# Altium PCB PCB1.PcbDoc
Units mil, origin at the board's own origin, x right, y up, seen from the top; angles counter-clockwise.
Board outline 6000 x 4000 mil, 2 copper layers (Top Layer, Bottom Layer); 70 components, 59 nets, 144 pads, 0 vias.
Unrouted connection lines stored in the file: 86.
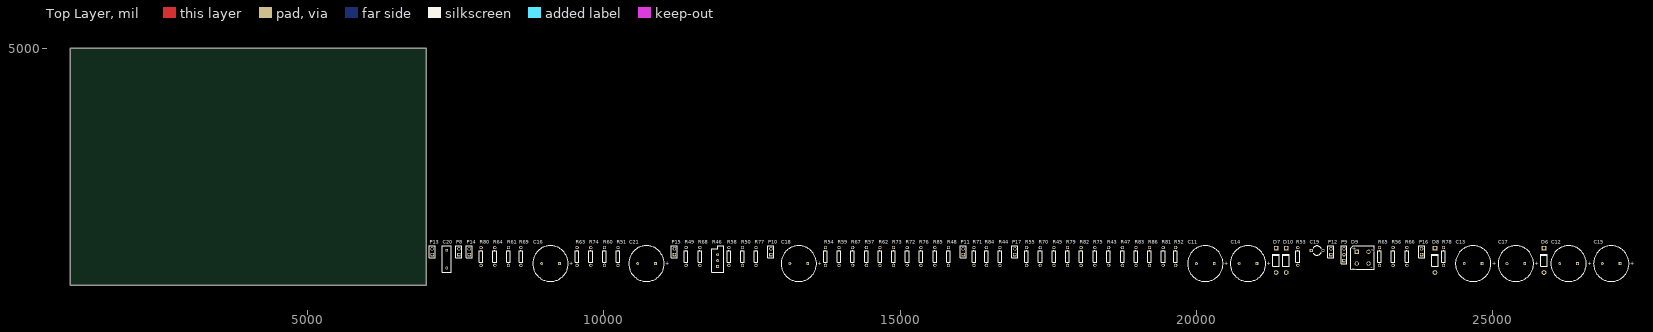
[diagram p0: Top Layer view]
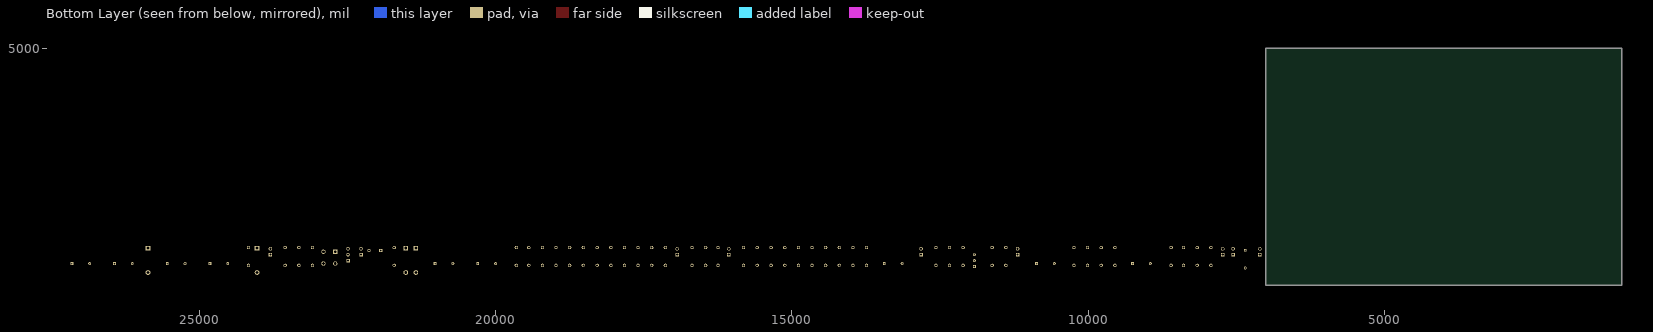
[diagram p1: Bottom Layer view, seen from below]

## Layer stack, top to bottom
Top Solder: solder mask 0.4, Solder Resist, Dk 3.5
Top Layer: signal copper 1.4
Dielectric 1: dielectric 12.6, FR-4, Dk 4.8
Bottom Layer: signal copper 1.4
Bottom Solder: solder mask 0.4, Solder Resist, Dk 3.5

## Board outline
1000,1000 7000,1000 7000,5000 1000,5000

## Design rules (kind name [scope] priority, off if disabled: settings)
Clearance [All] p1: gap=10 ignorepadtopadclearanceinfootprint=FALSE except(0: Arc-Hole Track-Hole SMDPad-Hole THPad-Hole Via-Hole Fill-Hole Poly-Hole Region-Hole Text-Hole)
PolygonConnect [All] p1: connectstyle=Relief reliefconductorwidth=10 reliefentries=4 polygonreliefangle="90 Angle" airgapwidth=10
RoomDefinition Sheet1 [InComponentClass('Sheet1')] p1: confinementstyle=ConfineIn formatcopy=TRUE lockcomponents=FALSE outline 7045,1060 27375,1060 27375,1780 7045,1780
RoutingVias [All] p1: holewidth=28 width=50 viastyle="Through Hole" minholewidth=28 minwidth=50 maxholewidth=28 maxwidth=50
SolderMaskExpansion [All] p1: expansion=4 istentingtop=FALSE
Width [All] p1: maxlimit=10 minlimit=10 preferedwidth=10
30 further rules are at their usual default settings.

## Components (designator, comment, footprint, x,y, rotation, side; value= is the part's Value field where it differs from the comment)
C11 "Cap Pol1" RB7.6-15 20150,1370 r0 top value=100uF
C12 "Cap Pol1" RB7.6-15 26280,1370 r0 top value=100uF
C13 "Cap Pol1" RB7.6-15 24670,1370 r0 top value=100uF
C14 "Cap Pol1" RB7.6-15 20870,1370 r0 top value=100uF
C15 "Cap Pol1" RB7.6-15 27000,1370 r0 top value=100uF
C16 "Cap Pol1" RB7.6-15 9100,1370 r0 top value=4.7uF
C17 "Cap Pol1" RB7.6-15 25390,1370 r0 top value=100uF
C18 "Cap Pol1" RB7.6-15 13290,1370 r0 top value=1uF
C19 "Cap2" CAPR5-4X5 22035,1590 r0 top value=100nF
C20 "Cap" RAD-0.3 7350,1445 r90 top value=680mF
C21 "Cap Pol1" RB7.6-15 10720,1370 r0 top value=100pF
D6 "1N4001" DO-41 25865,1425 r90 top
D7 "1N4001" DO-41 21345,1425 r90 top
D8 "1N4001" DO-41 24025,1425 r90 top
D9 "Bridge" D-38 22805,1470 r0 top
D10 "1N4001" DO-41 21515,1425 r90 top
P8 "Opto coupler" HDR1X2 7555,1520 r90 top
P9 "12AC" HDR1X3 22490,1420 r90 top
P10 "PID IN" HDR1X2 12820,1520 r90 top
P11 "PT100" HDR1X2 16065,1520 r90 top
P12 "SENSOR OUT" HDR1X2 22270,1520 r90 top
P13 "LOAD" HDR1X2 7105,1520 r90 top
P14 "230V" HDR1X2 7730,1520 r90 top
P15 "PID OUT" HDR1X2 11190,1520 r90 top
P16 "Opto coupler" HDR1X2 23800,1520 r90 top
P17 "SENSOR OUT" HDR1X2 16935,1520 r90 top
R43 "Res1" AXIAL-0.3 18520,1490 r90 top value=24K
R44 "Res1" AXIAL-0.3 16685,1490 r90 top value=24K
R45 "Res1" AXIAL-0.3 17595,1490 r90 top value=24K
R46 "RPot" VR5 11920,1420 r90 top value=22K
R47 "Res1" AXIAL-0.3 18750,1490 r90 top value=24K
R48 "Res1" AXIAL-0.3 15815,1490 r90 top value=24K
R49 "Res1" AXIAL-0.3 11390,1490 r90 top value=24K
R50 "Res1" AXIAL-0.3 12340,1490 r90 top value=24K
R51 "Res1" AXIAL-0.3 10240,1490 r90 top value=24K
R52 "Res1" AXIAL-0.3 19650,1490 r90 top value=24K
R53 "Res1" AXIAL-0.3 21710,1490 r90 top value=24K
R54 "Res1" AXIAL-0.3 13740,1490 r90 top value=24K
R55 "Res1" AXIAL-0.3 17135,1490 r90 top value=3.3K
R56 "Res1" AXIAL-0.3 23320,1490 r90 top value=24K
R57 "Res1" AXIAL-0.3 14430,1490 r90 top value=10K
R58 "Res1" AXIAL-0.3 12110,1490 r90 top value=14.7K
R59 "Res1" AXIAL-0.3 13970,1490 r90 top value=24K
R60 "Res1" AXIAL-0.3 10010,1490 r90 top value=24K
R61 "Res1" AXIAL-0.3 8390,1490 r90 top value=24K
R62 "Res1" AXIAL-0.3 14660,1490 r90 top value=16.87K
R63 "Res1" AXIAL-0.3 9550,1490 r90 top value=3.65K
R64 "Res1" AXIAL-0.3 8160,1490 r90 top value="100   2W"
R65 "Res1" AXIAL-0.3 23090,1490 r90 top value=24K
R66 "Res1" AXIAL-0.3 23550,1490 r90 top value=24K
R67 "Res1" AXIAL-0.3 14200,1490 r90 top value=10K
R68 "Res1" AXIAL-0.3 11620,1490 r90 top value=10K
R69 "Res1" AXIAL-0.3 8600,1490 r90 top value=10K
R70 "Res1" AXIAL-0.3 17365,1490 r90 top value=10K
R71 "Res1" AXIAL-0.3 16245,1490 r90 top value=1K
R72 "Res1" AXIAL-0.3 15120,1490 r90 top value=10K
R73 "Res1" AXIAL-0.3 14890,1490 r90 top value=10K
R74 "Res1" AXIAL-0.3 9780,1490 r90 top value=24K
R75 "Res1" AXIAL-0.3 18285,1490 r90 top value=10K
R76 "Res1" AXIAL-0.3 15350,1490 r90 top value=10K
R77 "Res1" AXIAL-0.3 12570,1490 r90 top value=10K
R78 "Res1" AXIAL-0.3 24170,1490 r90 top value=24K
R79 "Res1" AXIAL-0.3 17825,1490 r90 top value=10K
R80 "Res1" AXIAL-0.3 7930,1490 r90 top value="100 5W"
R81 "Res1" AXIAL-0.3 19440,1490 r90 top value=25K
R82 "Res1" AXIAL-0.3 18055,1490 r90 top value=25K
R83 "Res1" AXIAL-0.3 18980,1490 r90 top value=25K
R84 "Res1" AXIAL-0.3 16455,1490 r90 top value=25K
R85 "Res1" AXIAL-0.3 15585,1490 r90 top value=25K
R86 "Res1" AXIAL-0.3 19210,1490 r90 top value=25K

## Footprints (in the part's own frame and the unit in brackets; to place one, negate y for a bottom-side part, rotate by r counter-clockwise, add the part's x,y. Pads: shape width x height; smd on the part's side, far side on the other; paste and mask are expansions set on the pad)
AXIAL-0.3 [mm] "Axial Device, Thru-Hole; 2 Leads; 0.3 in Pin Spacing"
  round 1.4 hole 0.85: 1(-3.81,0) 2(3.81,0)
  silkscreen extent -2.77,-0.76 2.77,0.76
CAPR5-4X5 [mm] "Capacitor; 2 Leads"
  rect 1.35x1.35 hole 0.8: 1(-2.5,0)
  round 1.35 hole 0.8: 2(2.5,0)
  silkscreen extent -1.69,-2 1.82,2
D-38 [mm] "Bridge Rectifier; 4 Terminals; Body 9.4 x 9.4 mm (typ); Pitch 5.08 mm"
  rect 1.8x1.8 hole 1.2: 1(-2.54,2.54)
  round 1.8 hole 1.2: 2(-2.54,-2.54) 3(2.54,-2.54) 4(2.54,2.54)
  silkscreen extent -5,-5 5,5, body extent -5,-5 5,5, height 9.91
DO-41 [mm] "Diode, Axial; Body 5.2 x 2.7 mm (LxDia. max), Lead Dia. 0.86 mm (max)"
  round 2 hole 1.2: 1(-5.23,0)
  rect 2x2 hole 1.2: 2(5.23,0)
  silkscreen extent -2.65,-1.4 2.75,1.4
HDR1X2 [mm] "Connector; Header; 2 Position"
  rect 1.5x1.5 hole 0.9: 1(0,0)
  round 1.5 hole 0.9: 2(2.54,0)
  silkscreen extent -1.27,-1.27 3.81,1.27
HDR1X3 [mm] "Connector; Header; 3 Position"
  rect 1.5x1.5 hole 0.9: 1(0,0)
  round 1.5 hole 0.9: 2(2.54,0) 3(5.08,0)
  silkscreen extent -1.27,-1.27 6.35,1.27
RAD-0.3 [mm] "Radial Cap, Thru-Hole; 2 Leads; 0.3 in Pin Spacing"
  round 1.2 hole 0.7: 1(-3.81,0) 2(3.81,0)
  silkscreen extent -5.71,-1.91 5.71,1.91
RB7.6-15 [mm] "Polarized Capacitor (Radial); 2 Leads"
  rect 1.2x1.2 hole 0.7: 1(3.81,0)
  round 1.2 hole 0.7: 2(-3.81,0)
  silkscreen extent -7.62,-7.62 7.62,7.62
VR5 [mm] "Thru-Hole; 3 Leads"
  rect 1.2x1.2 hole 0.7: 1(-2.54,0)
  round 1.2 hole 0.7: 2(0,0) 3(2.54,0)
  silkscreen extent -5.08,-2.54 6.35,2.54

## Part data
C11 C12 C13 C14 C15 C16 C17 C18 C21: "Polarized Capacitor (Radial)", LatestRevisionDate=17-Jul-2002, LatestRevisionNote="Re-released for DXP Platform.", PackageDescription="Polarized Capacitor (Radial); 2 Leads", PackageReference=RB7.6-15, Published=8-Jun-2000, Publisher="Altium Limited"
C19 C20: "Capacitor", Publisher="Altium Limited"
  C19: PackageDescription="Capacitor; 2 Leads", PackageReference=CAPR5-4X5, Published=23-Sep-2002
  C20: LatestRevisionDate=17-Jul-2002, LatestRevisionNote="Re-released for DXP Platform.", PackageDescription="Radial Cap, Thru-Hole; 2 Leads; 0.3 in Pin Spacing", PackageReference=RAD-0.3, Published=8-Jun-2000
D6 D7 D8 D10: library part "Diode 1N4001", "1 Amp General Purpose Rectifier", Code_JEDEC=DO-204-AL, ComponentLink1Description="Manufacturer Link", ComponentLink1URL=http://www.fairchildsemi.com/, ComponentLink2Description=Datasheet, ComponentLink2URL=http://www.fairchildsemi.com/ds/1N%2F1N4001.pdf, DatasheetVersion=1998, LatestRevisionDate=17-Jul-2002, LatestRevisionNote="Re-released for DXP Platform.", PackageDescription="Diode, Axial; Body 5.2 x 2.7 mm (LxDia. max), Lead Dia. 0.86 mm (max)", PackageReference=DO-41, PackageVersion=Aug-1999, Published=8-Jun-2000, Publisher="Altium Limited"
D9: library part Bridge1, "Full Wave Diode Bridge", DatasheetVersion=E2732B, LatestRevisionDate=29-May-2009, LatestRevisionNote="Sch pins A & K swapped.", PackageDescription="Bridge Rectifier; 4 Terminals; Body 9.4 x 9.4 mm (typ); Pitch 5.08 mm", PackageReference=D-38, Published=8-Jun-2000, Publisher="Altium Limited"
P8 P10 P11 P12 P13 P14 P15 P16 P17: library part "Header 2", "Header, 2-Pin", LatestRevisionDate=17-Jul-2002, LatestRevisionNote="Re-released for DXP Platform.", Publisher="Altium Limited"
P9: library part "Header 3", "Header, 3-Pin", LatestRevisionDate=17-Jul-2002, LatestRevisionNote="Re-released for DXP Platform.", Publisher="Altium Limited"
R43 R44 R45 R47 R48 R49 R50 R51 R52 R53 R54 R55 R56 R57 R58 R59 R60 R61 R62 R63 R64 R65 R66 R67 R68 R69 R70 R71 R72 R73 R74 R75 R76 R77 R78 R79 R80 R81 R82 R83 R84 R85 R86: "Resistor", LatestRevisionDate=17-Jul-2002, LatestRevisionNote="Re-released for DXP Platform.", PackageDescription="Axial Device, Thru-Hole; 2 Leads; 0.3 in Pin Spacing", PackageReference=AXIAL-0.3, Published=8-Jun-2000, Publisher="Altium Limited"
R46: "Potentiometer", LatestRevisionDate=17-Jul-2002, LatestRevisionNote="Re-released for DXP Platform.", PackageDescription="Variable Resistor, Thru-Hole; 3 Leads", PackageReference=VR5, Published=8-Jun-2000, Publisher="Altium Limited", Set Position=0.5, Sim Note="Enter the Resistance value and the set point into parameter fields."

## Nets (pads, with @x,y where several pads share a name; then routed paths per layer and width w, separated by ;. In a path a pad name is that pad's centre, name@x,y a point inside that pad or via, vN(x,y) a via of type N, cw(c..) or ccw(c..) an arc to the next point about the centre after c; other vN are vias at no path point)
+12V: C15.1 R43.2 R46.2 R81.2
-12V: C14.2
GND: C11.1 C13.2 C14.1 C17.2 C19.2 C21.2 D9.3 D10.2 P8.1 P10.1 P11.2 P12.1 P15.2 P16.2 P17.2 R44.1 R46.1 R47.2 R51.2 R53.1 R59.2 R60.2 R61.2 R74.2 R76.2 R82.1 R85.2
NetC11_2: C11.2 D7.1
NetC12_1: C12.1 D6.2
NetC12_2: C12.2 C15.2
NetC13_1: C13.1 D8.2
NetC16_1: C16.1 R54.1 R57.2 R58.2
NetC16_2: C16.2 R63.2
NetC17_1: C17.1 R56.1 R65.1 R66.1 R78.2
NetC18_1: C18.1 R58.1
NetC18_2: C18.2 R68.2
NetC19_1: C19.1 R66.2
NetC20_1: C20.1 P13.1 P14.1
NetC20_2: C20.2 R80.2
NetC21_1: C21.1 P15.1 R77.1
NetD6_1: D6.1 D8.1 D9.4 P9.3
NetD7_2: D7.2 P9.1
NetD9_1: D9.1 R53.2
NetD9_2: D9.2 P9.2
NetD10_1: D10.1 R56.2
NetD11_1: P13.2
NetD11_2: P14.2 R64.2 R80.1
NetD11_3: 
NetP8_2: P8.2
NetP10_2: P10.2 R50.2
NetP11_1: P11.1 R55.2
NetP12_2: P12.2
NetP16_1: P16.1
NetP17_1: P17.1 R86.2
NetQ2_6: R64.1
NetQ3_2: R65.2
NetR43_1: R43.1 R44.2 R45.2
NetR45_1: R45.1 R48.2
NetR46_3: R46.3 R49.2
NetR47_1: R47.1 R52.2
NetR48_1: R48.1
NetR49_1: R49.1 R51.1
NetR50_1: R50.1 R54.2
NetR52_1: R52.1 R55.1
NetR57_1: R57.1 R62.2
NetR59_1: R59.1
NetR60_1: R60.1
NetR61_1: R61.1
NetR62_1: R62.1 R67.2
NetR63_1: R63.1 R69.2
NetR67_1: R67.1 R68.1 R69.1 R77.2
NetR70_1: R70.1 R75.1
NetR70_2: R70.2 R71.1
NetR71_2: R71.2 R72.1
NetR72_2: R72.2 R73.1
NetR73_2: R73.2 R79.1
NetR74_1: R74.1
NetR75_2: R75.2 R76.1
NetR78_1: R78.1
NetR79_2: R79.2 R84.1
NetR81_1: R81.1 R82.2 R83.1
NetR83_2: R83.2 R86.1
NetR84_2: R84.2 R85.1

## Text inside footprints (layer, text, board x,y; h text height)
C11: Top Overlay "+" at 20470.15,1340.99 h59.06
C12: Top Overlay "+" at 26600.15,1340.99 h59.06
C13: Top Overlay "+" at 24990.15,1340.99 h59.06
C14: Top Overlay "+" at 21190.15,1340.99 h59.06
C15: Top Overlay "+" at 27320.15,1340.99 h59.06
C16: Top Overlay "+" at 9420.15,1340.99 h59.06
C17: Top Overlay "+" at 25710.15,1340.99 h59.06
C18: Top Overlay "+" at 13610.15,1340.99 h59.06
C21: Top Overlay "+" at 11040.15,1340.99 h59.06
D9: Top Overlay "+" at 22631.38,1594.57 h59.06; Top Overlay "-" at 22945,1270 h59.05; Top Overlay "~" at 22625,1250 h59.05; Top Overlay "~" at 22945,1570 h59.05